# Altium PCB BTL_DLCN.PcbDoc
Units mm, origin at the board's own origin, x right, y up, seen from the top; angles counter-clockwise.
Board outline 41.15 x 26.29 mm, 2 copper layers (Top Layer, Bottom Layer); 18 components, 11 nets, 44 pads, 4 vias.
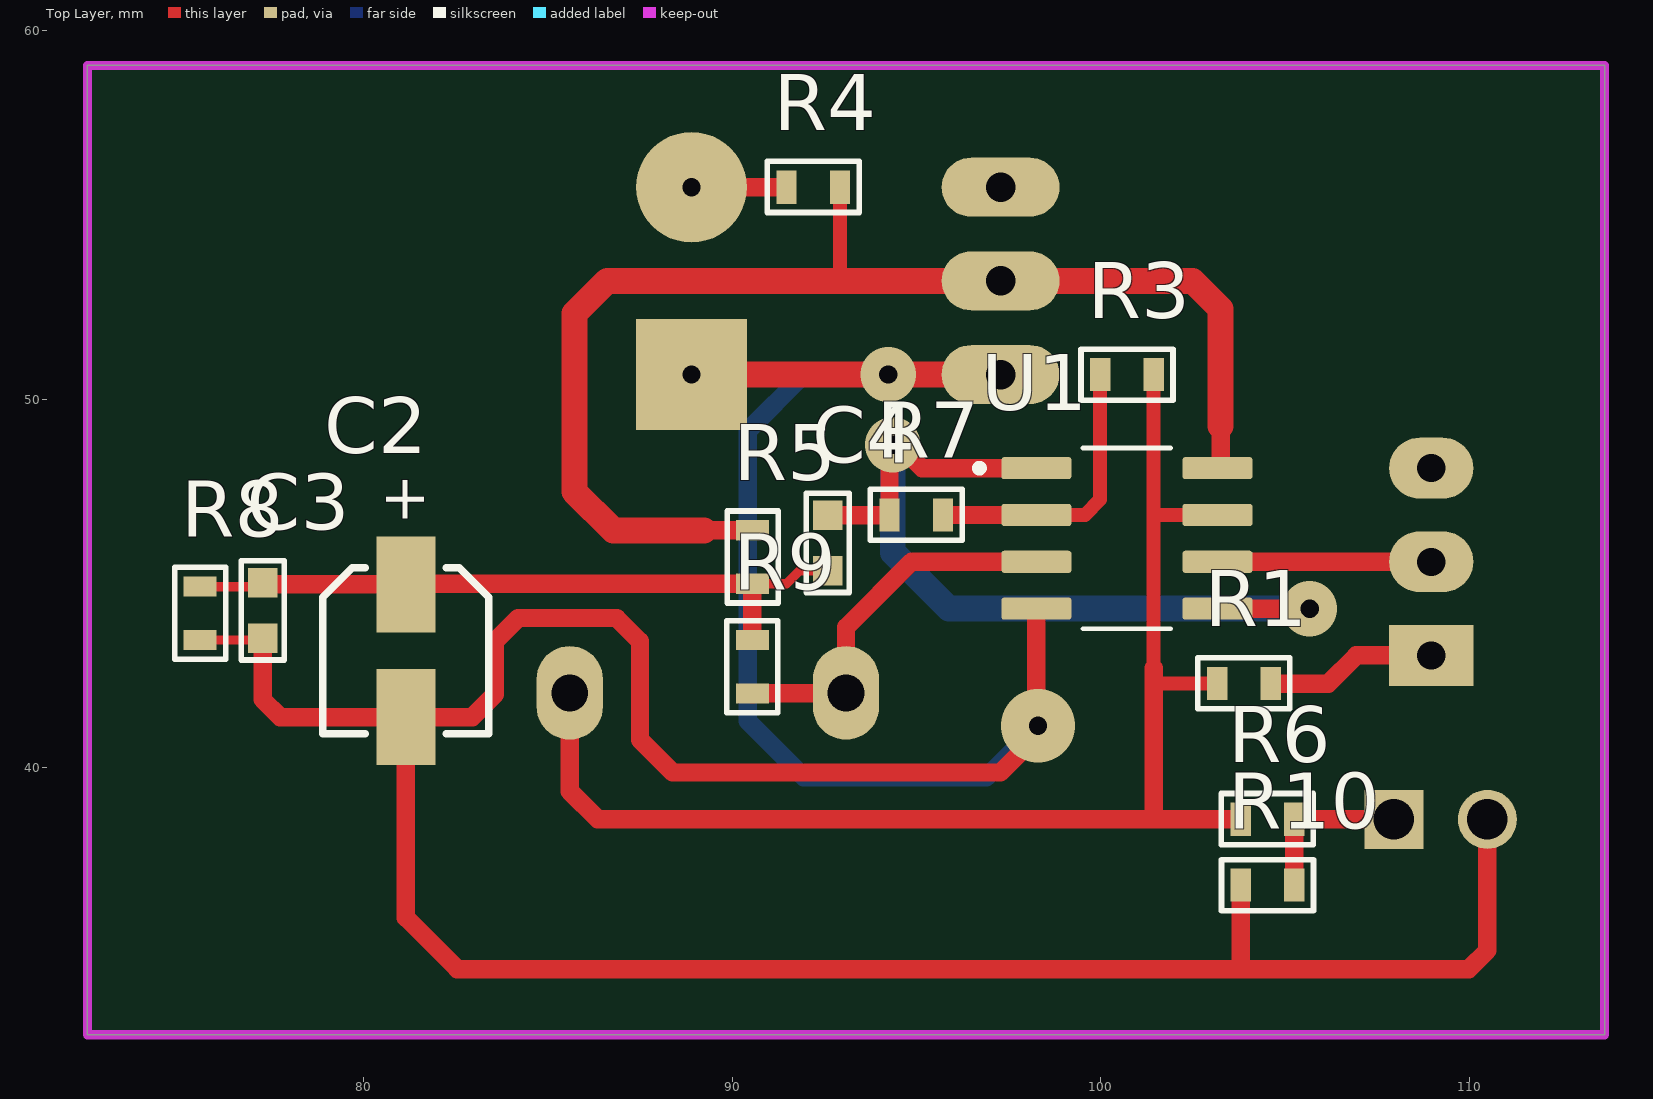
[diagram p0: Top Layer view]
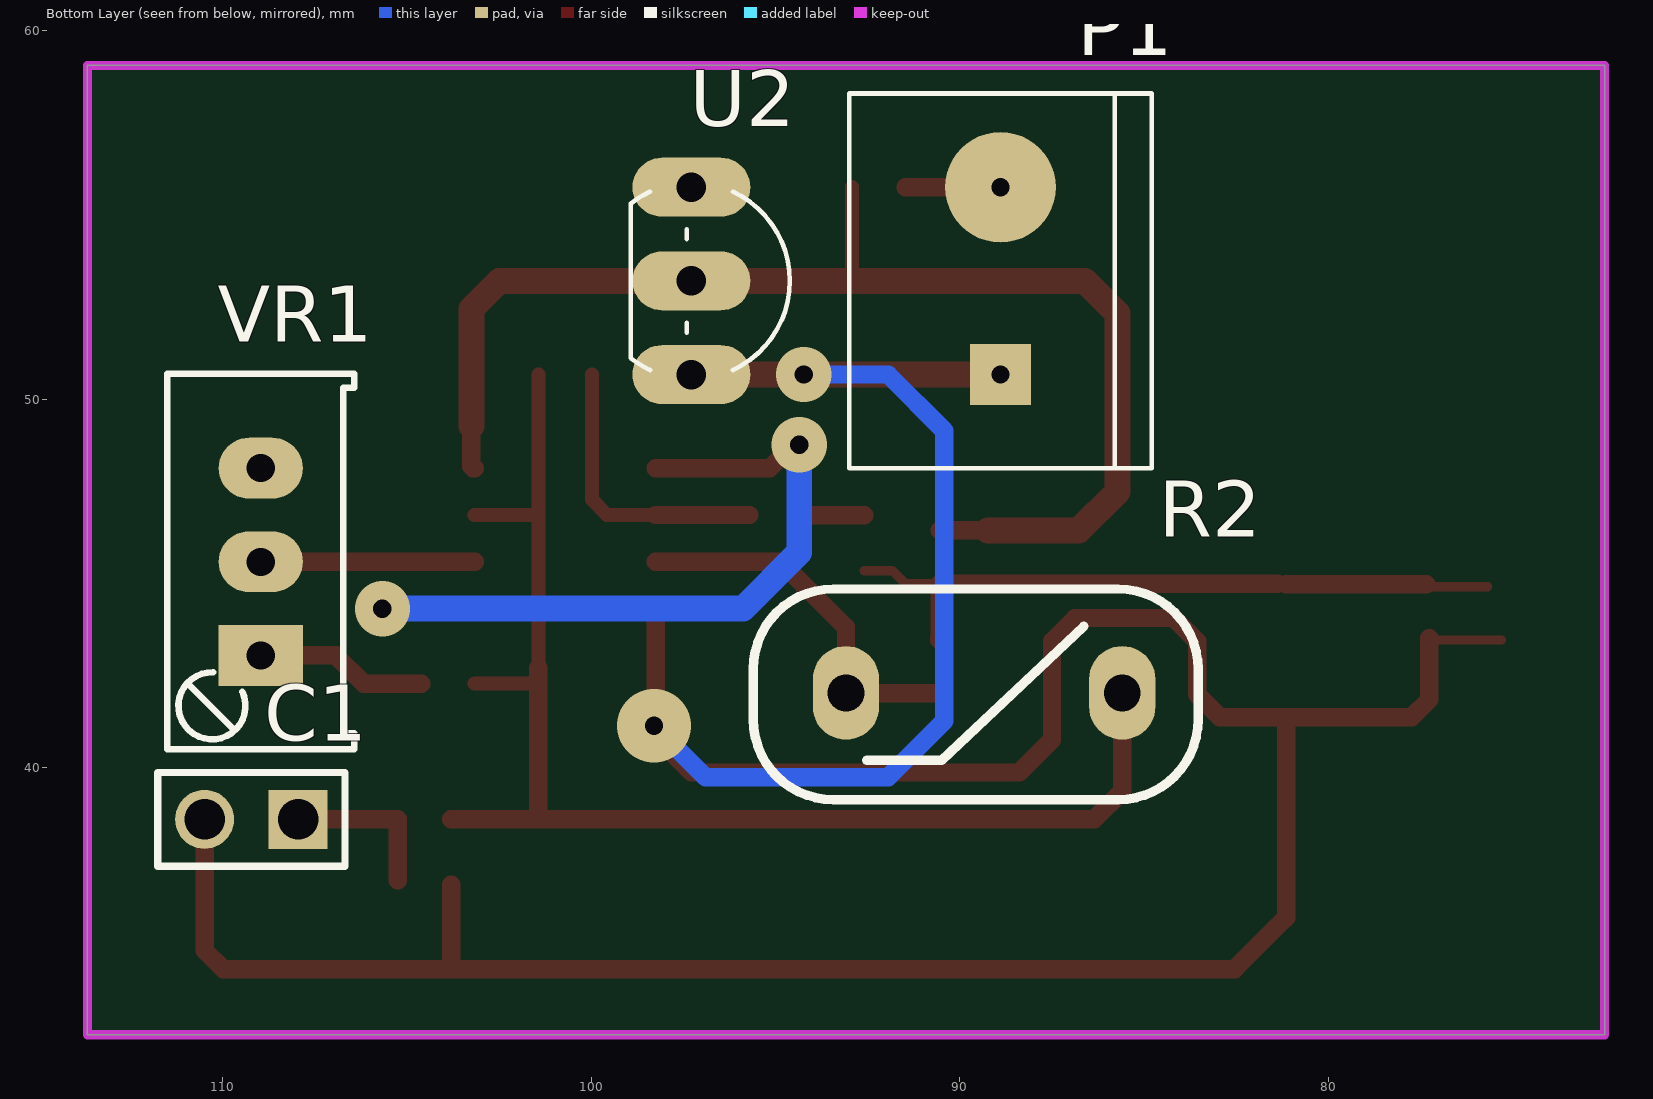
[diagram p1: Bottom Layer view, seen from below]
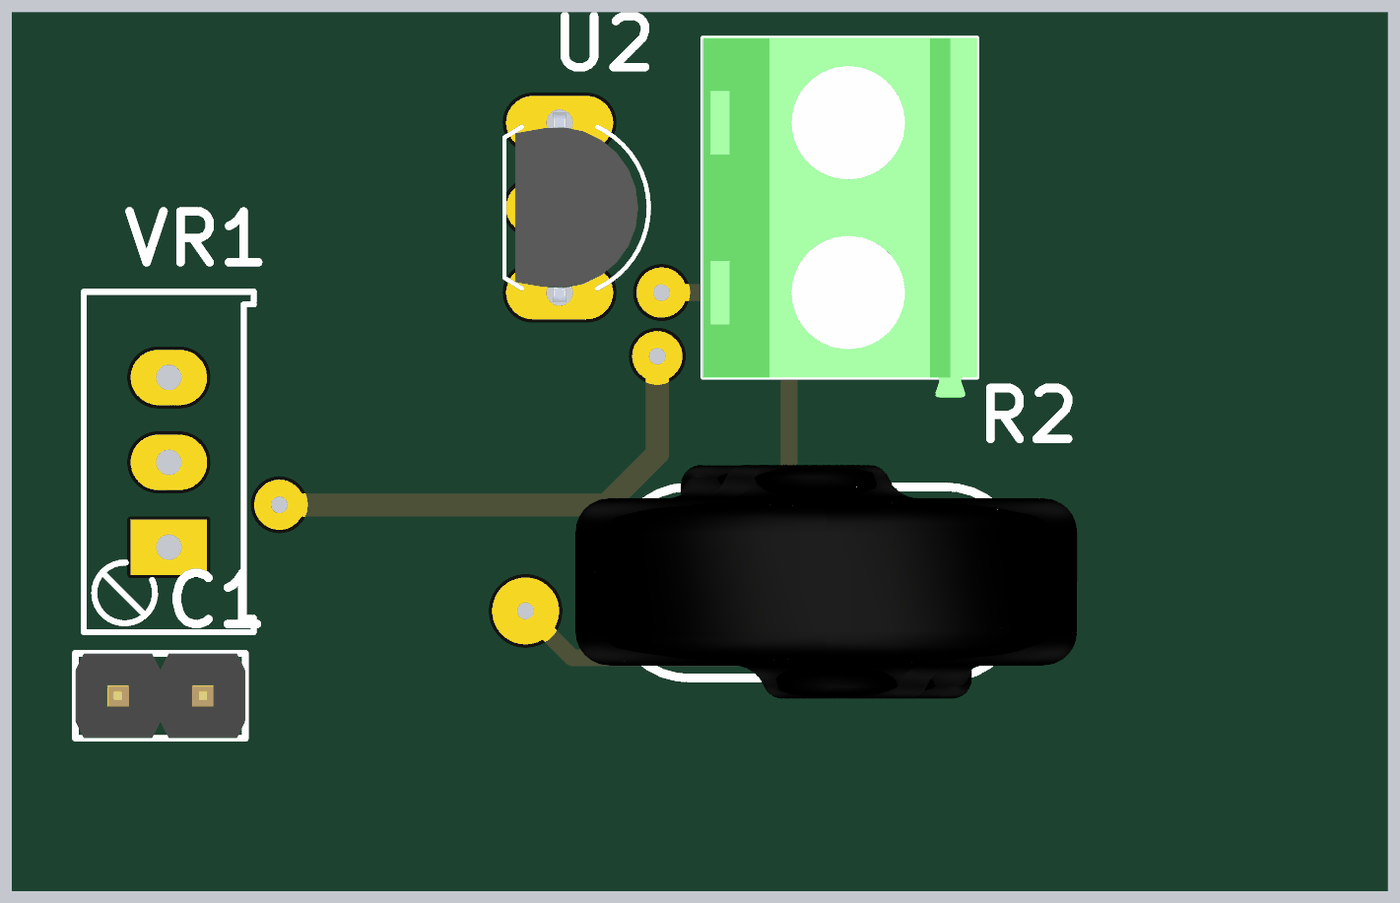
[diagram p2: 3D render of the assembled board from below, using the file's embedded part models]

## Layer stack, top to bottom
Top Solder: solder mask 0.0102, Solder Resist, Dk 3.5
Top Layer: signal copper 0.0356
Dielectric 1: dielectric 0.32, FR-4, Dk 4.8
Bottom Layer: signal copper 0.0356
Bottom Solder: solder mask 0.0102, Solder Resist, Dk 3.5

## Board outline
72.517,32.766 113.665,32.766 113.665,59.055 72.517,59.055

## Design rules (kind name [scope] priority, off if disabled: settings)
Clearance [All] p1: gap=0.254 ignorepadtopadclearanceinfootprint=FALSE
PolygonConnect [All] p1: connectstyle=Relief reliefconductorwidth=0.254 reliefentries=4 polygonreliefangle="90 Angle" airgapwidth=0.254
RoutingVias [All] p1: holewidth=0.711 width=1.27 viastyle="Through Hole" minholewidth=0.711 minwidth=1.27 maxholewidth=0.711 maxwidth=1.27
SolderMaskExpansion [All] p1: expansion=0.102 istentingtop=FALSE
SupplyNets "Schematic Supply Nets_3" [InNet('12V')] p1: voltage=0.000
SupplyNets "Schematic Supply Nets_2" [InNet('GND')] p2: voltage=0.000
SupplyNets "Schematic Supply Nets_1" [InNet('5V')] p3: voltage=0.000
SupplyNets "Schematic Supply Nets" [InNet('GND_Mid')] p4: voltage=0.000
Width [All] p1: maxlimit=0.7 minlimit=0.254 preferedwidth=0.5 bottomlayer_prefwidth=0.254 minimp=50.000000 maximp=50.000000 favimp=50.000000
30 further rules are at their usual default settings.

## Components (designator, comment, footprint, x,y, rotation, side; value= is the part's Value field where it differs from the comment)
C1 "JP2" JP2-D1T 107.95,38.608 r0 bottom
C2 "10u" WCAP-ASLI_D4H5.5 81.153,43.18 r90 top value="22uF, 6.3V"
C3 "0.1u" CAP_0603 77.343,44.323 r90 top value="6 pF, 50 VDC"
C4 "10n" CAP_0603 92.676,46.154 r90 top value="6 pF, 50 VDC"
P1 "282837-2" TE_282837-2 88.9,53.213 r90 bottom
R1 "51K" resistor_0603 103.886,42.291 r0 top value="10 Ohm, 1/4 W"
R2 "NTC-8D13" "NTC D13" 93.091,42.037 r180 bottom value=NTC
R3 "10K" resistor_0603 100.711,50.673 r180 top value="10 Ohm, 1/4 W"
R4 "1K" resistor_0603 92.202,55.753 r0 top value="10 Ohm, 1/4 W"
R5 "10K" resistor_0603 90.551,45.72 r270 top value="10 Ohm, 1/4 W"
R6 "10K" resistor_0603 104.521,38.608 r0 top value="10 Ohm, 1/4 W"
R7 "10K" resistor_0603 94.996,46.863 r0 top value="10 Ohm, 1/4 W"
R8 "10K" resistor_0603 75.565,44.196 r270 top value="10 Ohm, 1/4 W"
R9 "10K" resistor_0603 90.556,42.748 r90 top value="10 Ohm, 1/4 W"
R10 "20K" resistor_0603 104.521,36.83 r180 top value="10 Ohm, 1/4 W"
U1 "MCP6002-I/SN" SOIC127P600X175-8N 100.711,46.228 r0 top
U2 "LM336BZ2.5" TO92- 97.282,53.213 r270 bottom
VR1 "50K" VR-S3 108.966,43.053 r90 bottom

## Footprints (in the part's own frame and the unit in brackets; to place one, negate y for a bottom-side part, rotate by r counter-clockwise, add the part's x,y. Pads: shape width x height; smd on the part's side, far side on the other; paste and mask are expansions set on the pad)
CAP_0603 [mm]
  rect 0.8x0.8 smd: 1(-0.801,0.076) 2(0.699,0.076)
  silkscreen extent -1.4,-0.51 1.3,0.66, body extent -0.85,-0.32 0.75,0.48, height 0.8
JP2-D1T [mm] "2 pins, 1 row, straight, gold plating"
  rect 1.6x1.6 hole 1.1: 1(0,0)
  round 1.6 hole 1.1: 2(2.54,0)
  silkscreen extent -1.27,-1.27 3.81,1.27, body extent -1.27,-1.27 3.81,1.27, height 8.54
"NTC D13" [mm]
  oval 1.8x2.54 hole 1: 1(0,0) 2(7.493,0)
  silkscreen extent -2.51,-2.9 9.55,2.82, body extent -3.71,-3.52 11.28,3.48, height 27.5
resistor_0603 [mm]
  rect 0.55x0.9 smd: 1(-0.725,0) 2(0.725,0)
  silkscreen extent -1.25,-0.69 1.24,0.7, body extent -0.8,-0.45 0.8,0.45, height 0.5
SOIC127P600X175-8N [mm]
  rrect25% 1.9x0.6 smd: 1(-2.455,1.905) 2(-2.455,0.635) 3(-2.455,-0.635) 4(-2.455,-1.905) 5(2.455,-1.905) 6(2.455,-0.635) 7(2.455,0.635) 8(2.455,1.905)
  silkscreen extent -4.1,-2.45 1.19,2.45, body extent -3,-2.45 3,2.45, height 1.75
TE_282837-2 [mm]
  rect 1.65x1.65 / inner round 1.65 / far side rect 3x3 hole 0.5: 1(-2.54,0)
  round 3 hole 0.5: 2(2.54,0)
  silkscreen extent -5.08,-4.1 5.08,4.1, body extent -5.68,-4.1 5.08,4.1, height 10
TO92- [mm]
  oval 1.6x3.2 hole 0.8: 1(-2.54,0) 2(0,0) 3(2.54,0)
  silkscreen extent -2.42,-1.65 2.42,2.67, body extent -2.83,-1.33 2.83,2.35, height 9.34
VR-S3 [mil] "Variable Resistor"
  rect 65x90 hole 30: 1(0,0)
  oval 65x90 hole 30: 2(100,0) 3(200,0)
  silkscreen extent -100,-100 301,100, body extent -91,-98 291,90, height 430
WCAP-ASLI_D4H5.5 [mm] "Aluminium Electrolytic V-Chip SMT Capacitors, 4x5.5mm"
  rect 2.6x1.6 smd: 1(1.8,0) 2(-1.8,0)
  silkscreen extent -2.25,-2.25 2.25,2.25, body extent -2.5,-2.15 2.5,2.15, height 5.5

## Part data
C1: "WR-PHD 2.54 mm Angled Socket Header", Manufacturer="W¨¹rth Elektronik eiSos GmbH", partNo=613002143121, ComponentLink1 Description=Manufacturer, ComponentLink1URL=http://www.we-online.com, ComponentLink2 Description=Datasheet, ComponentLink2URL=http://katalog.we-online.de/em/datasheet/6130xx143121.pdf, Created by="Karrer Zheng", Created Date="29 March 2013", NoPins=02
C2: library part 865080140001, "V-Chip, D4 x H5.8mm, 22uF, 6.3V", Capacitance=22uF, Capacitance Tolerance=+/-20%, Leakage Current=3uA, Manufacturer="Wurth Elektronik", Manufacturer Part Number=N/A, Operating Temperature Max=105°C, Operating Temperature Min=-55°C, Rated Voltage (DC)=6.3V, Ripple Current=75mA, Category="Aluminum Electrolytic Capacitors", ComponentLink2Description="Datasheet Link", ComponentLink2URL=https://www.we-online.com/redexpert/spec/865080140001?ad, Diameter=4mm, Dissipation Factor=24%, Endurance=2000h, Height=5.8mm, Mount="Surface Mount", Packaging="Tape and Reel", Supplier 1 Name=Mouser, Supplier 1 SN=865080140001, Supplier 1 URL=https://www.mouser.vn/ProductDetail/Wurth-Elektronik/865080140001?qs=0KOYDY2FL2%2FITcChMQdw%252BQ%3D%3D&_gl=1*175azx5*_ga*MzUyMDUxMTAxLjE2ODc3NDI0MDM.*_ga_15W4STQT4T*MTY4OTEwMTM0NC4yLjAuMTY4OTEwMTM0NS4wLjAuMA..*_ga_1KQLCYKRX3*MTY4OTEwMTM0NC4yLjAuMTY4OTEwMTM0NS41OS4wLjA., Supplier 2 Name=Digi-Key, Supplier 2 SN=N/A, Supplier 2 URL=N/A, Supplier 3 Name=thegioiic, Supplier 3 SN=EEEFP0J220AR, Supplier 3 URL=https://www.thegioiic.com/tu-nhom-smd-22uf-6-3v-4x5-8mm-panasonic-eeefp0j220ar
C3 C4: library part 0106030600550, "CAP, size 0603, 6 pF, 50 VDC", Capacitance="6 pF", Manufacture Name=TDK, Manufacture SN=CGA3E2NP01H060D080AA, Operating Temperature="-55 to +125degC", Tolerance=+/-5%, Voltage Rating DC="50 VDC", ComponentLink2Description=Datasheet, ComponentLink2URL=https://product.tdk.com/system/files/dam/doc/product/capacitor/ceramic/mlcc/catalog/mlcc_automotive_hightemp_en.pdf?ref_disty=mouser, Mounting Technology=SMT, Packaging="Tape and Reel", Size=0603, Supplier 1 Name=Mouser, Supplier 1 SN=810-CGA3E2NP01H060DA, Supplier 1 URL=https://www.mouser.com/ProductDetail/TDK/CGA3E2NP01H060D080AA?qs=xLDY6iXSiQboN%2F6my%2FnNkQ%3D%3D&utm_source=mouser-refine-download&utm_medium=file&utm_campaign=CGA3E2NP01H060D080AA&utm_content=TDK, Supplier 2 Name=Digi-Key, Supplier 2 SN=445-12427-2-ND, Supplier 2 URL=https://www.digikey.com/en/products/detail/tdk-corporation/cga3e2np01h060d080aa/3949663, Supplier 3 Name=thegioiic, Supplier 3 SN=N/A, Supplier 3 URL=N/A
P1: "Ð Ð°Ð·ÑŠÐµÐ¼Ð½Ñ‹Ðµ ÐºÐ»ÐµÐ¼Ð¼Ð½Ñ‹Ðµ ÐºÐ¾Ð»Ð¾Ð´ÐºÐ¸ Ð Ð¾Ð·ÐµÑ‚ÐºÐ° 2 Ð¿Ð¾Ð»Ð¾Ð¶ÐµÐ½Ð¸Ñ 5,08 Ð¼Ð¼ ÐŸÑ€Ð¸Ð¿Ð¾Ð¹ Ð¿Ñ€ÑÐ¼Ð¾Ð¹ Ñ‡ÐµÑ€ÐµÐ· Ð¾Ñ‚Ð²ÐµÑ€ÑÑ‚Ð¸Ðµ 13,5 Ð / ÐºÐ¾Ð½Ñ‚Ð°ÐºÑ‚", Package=None, Availability="In Stock", Check_prices=https://www.snapeda.com/parts/282837-2/TE+Connectivity+AMP+Connectors/view-part/?ref=eda, MF="TE Connectivity", MP=282837-2, Price=None, Purchase-URL=https://pricing.snapeda.com/search/part/282837-2/?ref=eda, SnapEDA_Link=https://www.snapeda.com/parts/282837-2/TE+Connectivity+AMP+Connectors/view-part/?ref=snap
R1: library part 0006031005, "https://www.thegioiic.com/dien-tro-51-kohm-0603-1-", Manufacture  Name=Panasonic, Manufacture  SN=ERJ-UP3J100V, Rated Power="1/4 W", Resistance="10 Ohm", Resistance Tolerance=+/-5%, ComponentLink1Description="Datasheet link", ComponentLink1URL=https://www.mouser.vn/datasheet/2/315/Panasonic_Resistors_Thick_Film_Anti_Sulf_Anti_Surg-1825099.pdf, ComponentLink2Description="Supplier 1 URL", ComponentLink2URL=N/A, ComponentLink3Description="Supplier 2 URL", ComponentLink3URL=https://www.digikey.com/en/products/detail/panasonic-electronic-components/ERJ-UP3J100V/12092287, ComponentLink4Description="Supplier 3 URL", ComponentLink4URL=N/A, Mounting Technology=SMT, Size=0603, Supplier 1 Name=Mouser, Supplier 1 SN=667-ERJ-UP3J100V, Supplier 1 URL=https://www.mouser.vn/ProductDetail/Panasonic/ERJ-UP3J100V?qs=GedFDFLaBXHtQF28GWvg8g%3D%3D, Supplier 2 Name=Digi-Key, Supplier 2 SN="10-ERJ-UP3J100VTR-ND - Tape & Reel (TR)", Supplier 2 URL=https://www.digikey.com/en/products/detail/panasonic-electronic-components/ERJ-UP3J100V/12092287, Supplier 3 Name=thegioiic, Supplier 3 SN=N/A, Supplier 3 URL=N/A
R2: library part NTC, "https://www.thegioiic.com/mf52-103-dien-tro-nhiet-ntc-10-kohm"
R3 R4 R5 R6 R7 R8 R9 R10: library part 0006031005, "RES, size 0603, 10 Ohm, 1/4 W", Manufacture  Name=Panasonic, Manufacture  SN=ERJ-UP3J100V, Rated Power="1/4 W", Resistance="10 Ohm", Resistance Tolerance=+/-5%, ComponentLink1Description="Datasheet link", ComponentLink1URL=https://www.mouser.vn/datasheet/2/315/Panasonic_Resistors_Thick_Film_Anti_Sulf_Anti_Surg-1825099.pdf, ComponentLink2Description="Supplier 1 URL", ComponentLink2URL=N/A, ComponentLink3Description="Supplier 2 URL", ComponentLink3URL=https://www.digikey.com/en/products/detail/panasonic-electronic-components/ERJ-UP3J100V/12092287, ComponentLink4Description="Supplier 3 URL", ComponentLink4URL=N/A, Mounting Technology=SMT, Size=0603, Supplier 1 Name=Mouser, Supplier 1 SN=667-ERJ-UP3J100V, Supplier 1 URL=https://www.mouser.vn/ProductDetail/Panasonic/ERJ-UP3J100V?qs=GedFDFLaBXHtQF28GWvg8g%3D%3D, Supplier 2 Name=Digi-Key, Supplier 2 SN="10-ERJ-UP3J100VTR-ND - Tape & Reel (TR)", Supplier 2 URL=https://www.digikey.com/en/products/detail/panasonic-electronic-components/ERJ-UP3J100V/12092287, Supplier 3 Name=thegioiic, Supplier 3 SN=N/A, Supplier 3 URL=N/A
U1: "Microchip , Dual Op Amp, 1MHzCMOS, Rail to Rail, 3V, 5V, 8-Pin SOIC", Package="SO-8 Microchip", Check_prices=https://www.snapeda.com/parts/MCP6002-I/SN/Microchip/view-part/?ref=eda, MF=Microchip, MP=MCP6002-I/SN, SnapEDA_Link=https://www.snapeda.com/parts/MCP6002-I/SN/Microchip/view-part/?ref=snap
U2: "Voltage reference diode", Package="TO-92-3 Texas Instruments", Check_prices=https://www.snapeda.com/parts/LM336BZ-2.5/NOPB/Texas+Instruments/view-part/?ref=eda, MF="Texas Instruments", MP=LM336BZ-2.5/NOPB, SnapEDA_Link=https://www.snapeda.com/parts/LM336BZ-2.5/NOPB/Texas+Instruments/view-part/?ref=snap
VR1: library part "Resistor Var", "https://www.thegioiic.com/3296w-503-bien-tro-chiet-ap-50-kohm-3-chan-chinh-top-0-5w"

## Via types
v1: diameter 1.5, hole 0.5, Top Layer to Bottom Layer, 3 vias
v2: diameter 2, hole 0.5, Top Layer to Bottom Layer, 1 vias

## Nets (pads, with @x,y where several pads share a name; then routed paths per layer and width w, separated by ;. In a path a pad name is that pad's centre, name@x,y a point inside that pad or via, vN(x,y) a via of type N, cw(c..) or ccw(c..) an arc to the next point about the centre after c; other vN are vias at no path point)
5V: R4.2 R5.1 U1.8 U2.2 | length 35.2
  Top Layer w0.381: 92.927,53.213 R4.2
  Top Layer w0.5: 89.236,46.445 R5.1 ; U1.8 103.201,48.133 103.251,48.183 103.251,49.276
  Top Layer w0.7: 89.236,46.445 86.778,46.445 85.725,47.498 85.725,52.324 86.614,53.213 92.927,53.213 U2.2 102.489,53.213 103.251,52.451 103.251,49.276
12V: P1.2 R4.1 | length 2.6
  Top Layer w0.5: P1.2 R4.1
GND: C1.2 C2.2 C3.1 P1.1 R8.2 R10.2 U1.4 U2.3 | length 105.2
  Top Layer w0.254: R8.2@75.311,43.471 77.216,43.471 C3.1
  Top Layer w0.5: C3.1 77.267,41.859 77.746,41.38 C2.2 ; v1(94.234,50.673) v1@94.271,50.636 ; U1.4 98.256,40.852 97.282,39.878 88.392,39.878 87.503,40.767 87.503,41.974 87.503,43.434 86.868,44.069 84.201,44.069 83.566,43.434 83.566,41.993 82.953,41.38 C2.2 ; R10.2 103.796,34.544 ; C1.2 110.49,35.052 109.982,34.544 103.796,34.544 ; C2.2 81.153,35.941 82.55,34.544 103.796,34.544
  Top Layer w0.7: P1.1 v1(94.234,50.673) U2.3
  Bottom Layer w0.5: v1(94.234,50.673) 91.948,50.673 90.424,49.149 90.424,41.275 91.948,39.751 96.901,39.751 v2(98.298,41.148)
GND_Mid: C2.1 C3.2 C4.1 R5.2 R8.1 R9.2 | length 18.3
  Top Layer w0.254: R8.1@75.692,44.921 77.166,44.921 C3.2 ; R5.2 91.477,44.995 91.835,45.353 C4.1
  Top Layer w0.5: C3.2@77.352,44.98 C2.1 ; C2.1@81.392,44.995 R5.2 90.554,44.992 90.554,43.476 R9.2
NetC1_1: C1.1 R6.2 R10.1 | length 4.4
  Top Layer w0.5: R10.1@105.246,36.957 R6.2 C1.1
NetC4_2: C4.2 R7.1 U1.1 U1.5 | length 25.1
  Top Layer w0.5: C4.2 92.605,46.858 R7.1@94.266,46.858 ; R7.1 94.271,48.678 v1(94.361,48.768) 94.519,48.768 95.154,48.133 U1.1 ; U1.5 v1(105.664,44.323)
  Bottom Layer w0.7: v1(94.361,48.768) 94.361,45.847 95.885,44.323 v1(105.664,44.323)
NetR1_1: R1.1 R2.2 R3.1 R6.1 U1.7 | length 36.7
  Top Layer w0.381: 101.436,42.291 R1.1 ; 101.436,42.709 101.436,46.863 ; R3.1 101.436,46.863 ; U1.7 101.436,46.863
  Top Layer w0.5: R2.2 85.598,39.37 86.36,38.608 101.346,38.608 ; 101.436,42.709 101.436,42.291 101.436,38.698 101.346,38.608 ; R6.1 101.346,38.608
NetR1_2: R1.2 VR1.1 | length 4.7
  Top Layer w0.5: R1.2 106.172,42.291 106.934,43.053 VR1.1
NetR2_1: R2.1 R9.1 U1.3 | length 10.2
  Top Layer w0.5: R9.1@90.556,42.005 R9.1@90.563,42.012 ; R9.1@90.563,42.03 93.084,42.03 R2.1 93.091,43.815 94.869,45.593 U1.3
NetR3_2: R3.2 R7.2 U1.2 | length 7.8
  Top Layer w0.381: U1.2 99.568,46.863 99.986,47.281 R3.2
  Top Layer w0.5: R7.2 U1.2
NetU1_6: U1.6 VR1.2 | length 5.8
  Top Layer w0.5: U1.6 VR1.2
pads on no net: U2.1 VR1.3

## Keep-outs
Keep-Out Layer:
  the board outline again, w0.254

## Text inside footprints (layer, text, board x,y; h text height)
C2: Top Overlay "+" at 81.653,46.58 h1.22 r90